# Altium PCB USB转换器.PcbDoc
Units mil, origin at the board's own origin, x right, y up, seen from the top; angles counter-clockwise.
Board outline 2450 x 1645 mil, 2 copper layers (Top Layer, Bottom Layer); 42 components, 32 nets, 189 pads, 33 vias.
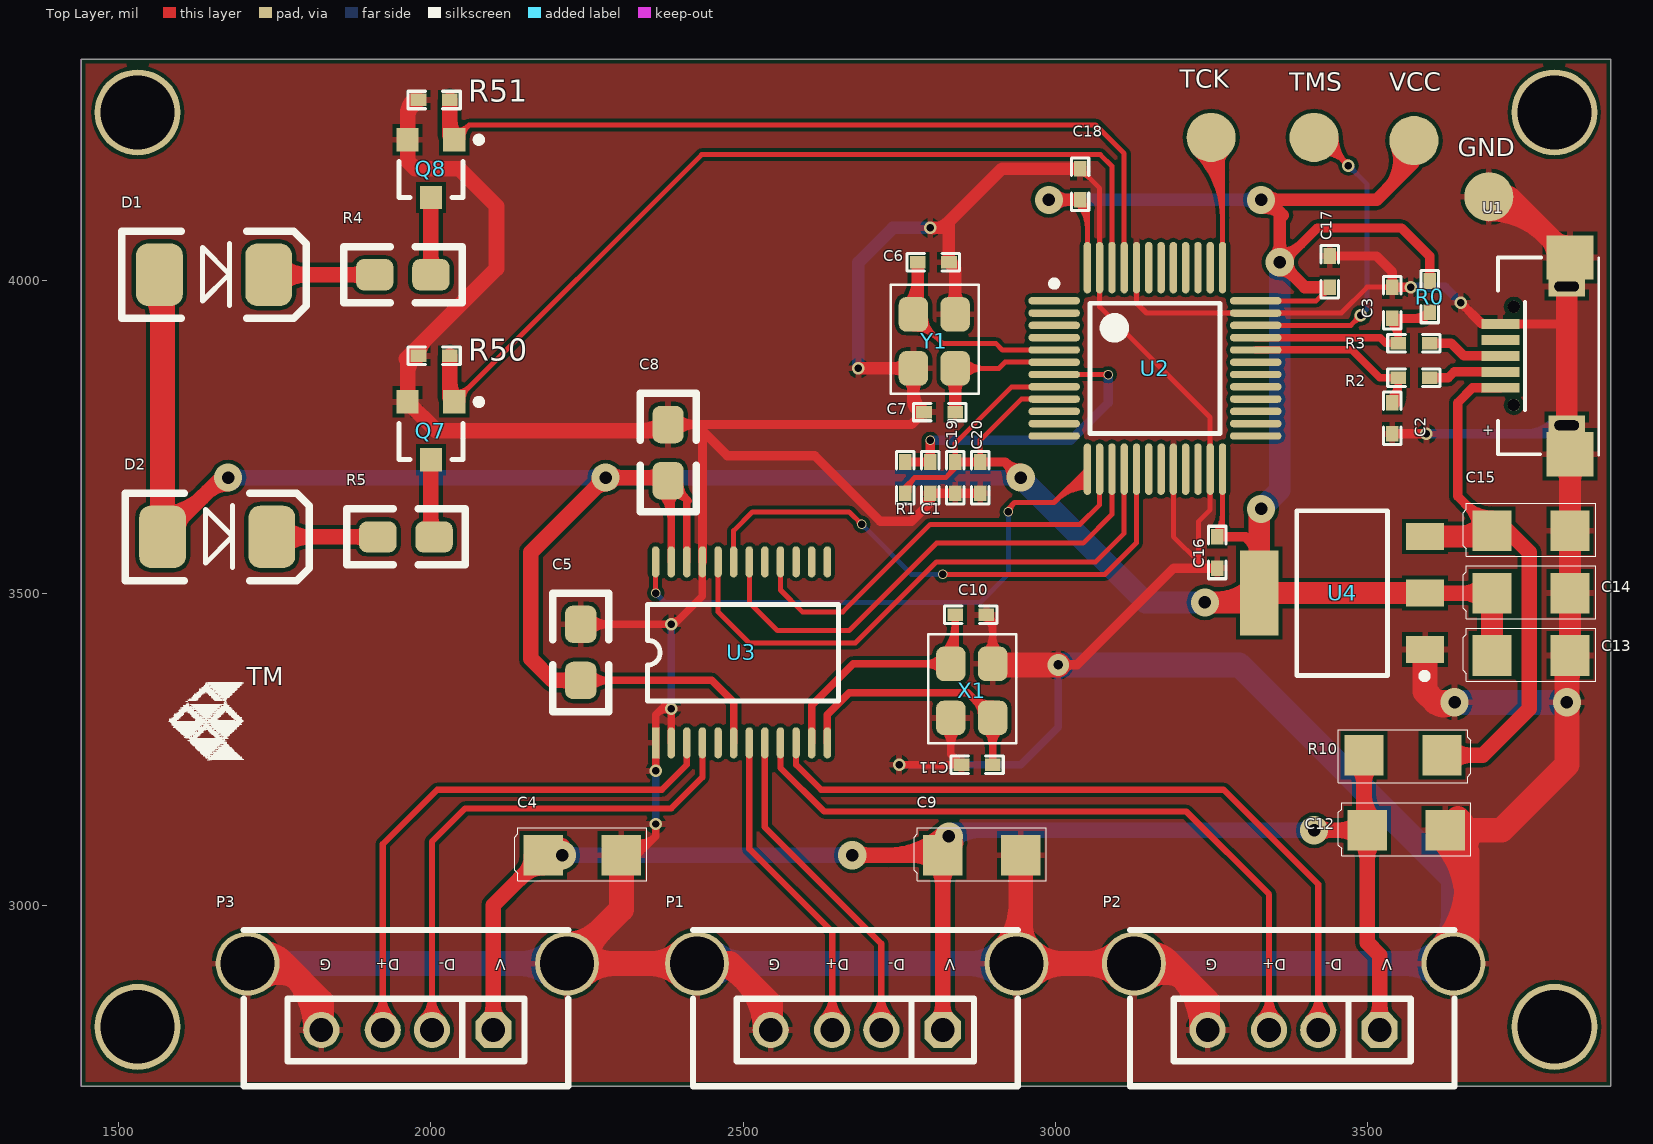
[diagram p0: Top Layer view]
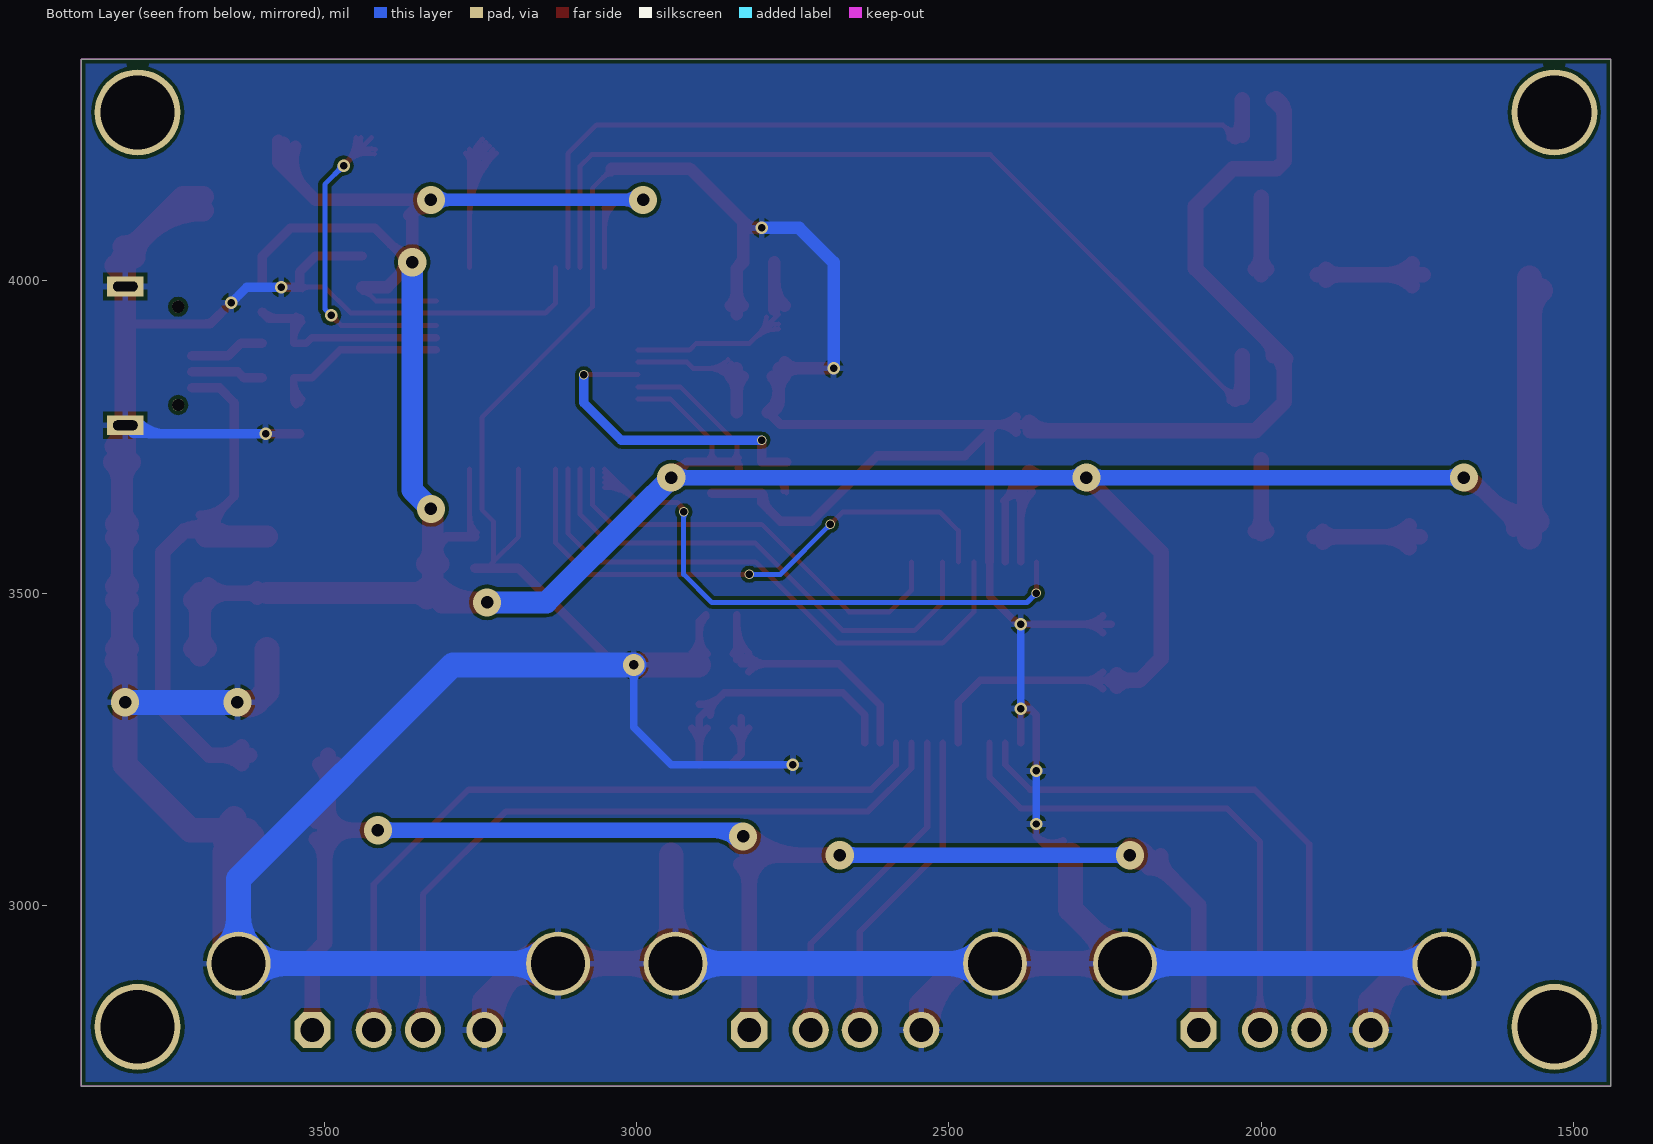
[diagram p1: Bottom Layer view, seen from below]

## Layer stack, top to bottom
Top Layer: signal copper 1.4
Dielectric: dielectric 12.6, FR-4, Dk 4.8
Bottom Layer: signal copper 1.4

## Board outline
1440,2710 1440,4355 3890,4355 3890,2710

## Design rules (kind name [scope] priority, off if disabled: settings)
Clearance [All] p1: gap=6
HoleSize [All] p1: absolutevalues=TRUE maxlimit=1000 minlimit=1 maxpercent=80.000 minpercent=20.000
HoleToHoleClearance [All] p1: gap=0 allowstackedmicrovias=TRUE
MinimumSolderMaskSliver [All] p1: minsoldermaskwidth=0
PolygonConnect [All] p1: connectstyle=Relief reliefconductorwidth=10 reliefentries=4 polygonreliefangle="90 Angle"
RoutingVias [All] p1: holewidth=28 width=50 viastyle="Through Hole" minholewidth=28 minwidth=50 maxholewidth=28 maxwidth=50
SilkToSilkClearance [All] p1: silktosilkclearance=0
SilkscreenOverComponentPads [All] p1: minsilkscreentomaskgap=0
SolderMaskExpansion [All] p1: expansion=4
TestPointUsage [All] p1: valid=0 allowmultiple=FALSE
Testpoint [All] p1: side=15 testpointundercomponent=TRUE minsize=40 maxsize=100 preferedsize=60 minholesize=0 maxholesize=40 preferedholesize=32 testpointgrid=1 style=1023 order=0123456789
Width [All] p1: maxlimit=40 minlimit=6 preferedwidth=8
19 further rules are at their usual default settings.

## Components (designator, comment, footprint, x,y, rotation, side; value= is the part's Value field where it differs from the comment)
C1 "20pF" 0402S 2800,3710 r270 top
C2 "10pF" 0402S 3540,3805 r270 top
C3 "10pF" 0402S 3540,3940 r90 top
C4 "47u" 3216C 2180,3080 r180 top
C5 "0.1uF" 0805 2240,3360 r90 top
C6 "20pF" 0402S 2780,4030 r0 top
C7 "20pF" 0402S 2840,3790 r180 top
C8 "0.01uF" 0805 2380,3680 r90 top
C9 "47u" 3216C 2820,3080 r180 top
C10 "20PF" 0402S 2840,3465 r0 top
C11 "20PF" 0402S 2900,3225 r180 top
C12 "47u" 3216C 3500,3120 r180 top
C13 "47uF" 3216C 3700,3400 r180 top
C14 "47uF" 3216C 3700,3500 r180 top
C15 "47uF" 3216C 3700,3600 r180 top
C16 "Cap" 0402S 3260,3540 r90 top
C17 "Cap" 0402S 3440,4040 r270 top
C18 "Cap" 0402S 3040,4180 r270 top
C19 "Cap" 0402S 2840,3660 r90 top
C20 "Cap" 0402S 2880,3660 r90 top
D1 "SS210" 7227D 1740,4010 r180 top
D2 "SS210" 7227D 1745,3590 r180 top
P1 "USB" USBA 2820,2800 r180 top
P2 "USB" USBA 3520,2800 r180 top
P3 "USB" USBA 2100,2800 r180 top
Q7 "SI2302" SOT23A 2000,3760 r180 top
Q8 "SI2302" SOT23A 2000,4180 r180 top
R0 "Res1" 0402S 3600,4000 r270 top
R1 "Res1" 0402S 2760,3710 r270 top
R2 "Res1" 0402S 3600,3845 r180 top
R3 "Res1" 0402S 3600,3900 r180 top
R4 "1K" 0805 2000,4010 r180 top
R5 "1K" 0805 2005,3590 r180 top
R10 "Res1" 3216C 3620,3240 r0 top
R50 "1M" 0402S 1980,3880 r0 top
R51 "1M" 0402S 1980,4290 r0 top
U1 "MicroUSB" Micro-USB 3800,3880 r90 top
U2 "STM32F103C" LQFP-48_M 3160,3860 r0 top
U3 "CH374U" SSOP24 2360,3260 r0 top
U4 "LM1117_3V3" SOT-223 3460,3500 r90 top
X1 "XTAL" 3225_无源 2900,3300 r90 top
Y1 "XTAL" 3225_无源 2840,3860 r90 top

## Footprints (in the part's own frame and the unit in brackets; to place one, negate y for a bottom-side part, rotate by r counter-clockwise, add the part's x,y. Pads: shape width x height; smd on the part's side, far side on the other; paste and mask are expansions set on the pad)
0402S [mil]
  rect 25x20 smd: 1(0,0) 2(50,0)
  silkscreen extent -17,-14 67,14
0805 [mil]
  rrect50% 60x50 smd: 1(0,0) 2(90,0)
  silkscreen extent -50,-45 140,45
3216C [mm]
  rect 1.6x1.65 smd: 1(0,0) 2(-3.175,0)
  silkscreen extent -4.22,-1.12 1.17,1.04
3225_无源 [mm]
  rrect50% 1.4x1.2 smd: 1(0,0) 2(2.2,1.7) GND(0,1.7) GND(2.2,0)
  silkscreen extent -1.04,-0.97 3.4,2.62
7227D [mil]
  rrect50% 75x100 smd: 1(175,0) 2(0,0)
  silkscreen extent -60,-70 235,70
LQFP-48_M [mm] "Thin QFP, 48-Leads, Body 7x7mm, Pitch 0.5mm, IPC Low Density"
  oval 2.1x0.3 smd: 1(-4.1,2.75) 2(-4.1,2.25) 3(-4.1,1.75) 4(-4.1,1.25) 5(-4.1,0.75) 6(-4.1,0.25) 7(-4.1,-0.25) 8(-4.1,-0.75) 9(-4.1,-1.25) 10(-4.1,-1.75) 11(-4.1,-2.25) 12(-4.1,-2.75) 25(4.1,-2.75) 26(4.1,-2.25) 27(4.1,-1.75) 28(4.1,-1.25) 29(4.1,-0.75) 30(4.1,-0.25) 31(4.1,0.25) 32(4.1,0.75) 33(4.1,1.25) 34(4.1,1.75) 35(4.1,2.25) 36(4.1,2.75)
  oval 0.3x2.1 smd: 13(-2.75,-4.1) 14(-2.25,-4.1) 15(-1.75,-4.1) 16(-1.25,-4.1) 17(-0.75,-4.1) 18(-0.25,-4.1) 19(0.25,-4.1) 20(0.75,-4.1) 21(1.25,-4.1) 22(1.75,-4.1) 23(2.25,-4.1) 24(2.75,-4.1) 37(2.75,4.1) 38(2.25,4.1) 39(1.75,4.1) 40(1.25,4.1) 41(0.75,4.1) 42(0.25,4.1) 43(-0.25,4.1) 44(-0.75,4.1) 45(-1.25,4.1) 46(-1.75,4.1) 47(-2.25,4.1) 48(-2.75,4.1)
  silkscreen extent -4.22,-2.65 2.65,3.57, body extent -3.5,-3.5 3.5,3.5, height 1.6
Micro-USB [mm]
  rect 0.4x1.55 smd: 1(-1.3,2.2) 2(-0.65,2.2) 3(0,2.2) 4(0.65,2.2) 5(1.3,2.2)
  rect 1.8x1.9 smd: S1(-4,-0.635) S2(4,-0.635)
  rect 0.8x1.5 hole 0.4 slot 1 at 90 deg: S3(-2.825,-0.5) S4(2.825,-0.5)
  round 0.5 hole 0.5 unplated: ""(-2,1.65) ""(2,1.65)
  silkscreen extent -4.05,-1.8 4,2.3
SOT23A [mm] "SOT-23; 3 Leads; Body 3.0 x 2.5 mm, inc. leads (LxW max)"
  rect 0.9x0.95 smd: 1(-0.95,-1.175) 2(0.95,-1.175) 3(0,1.175)
  silkscreen extent -2.07,-1.3 1.3,1.18
SOT-223 [mm]
  rect 1.1x1.55 smd: 1(-2.3,-3.375) 2(0,-3.375) 3(2.3,-3.375)
  rect 3.45x1.55 smd: 4(0,3.375)
  silkscreen extent -3.5,-3.48 3.35,1.85, body extent -3.3,-3.94 3.3,3.43, height 0.8
SSOP24 [mil]
  rect 12x50 smd: 1(0,0)
  oval 12x50 smd: 2(25,0) 3(50,0) 4(75,0) 5(100,0) 6(125,0) 7(150,0) 8(175,0) 9(200,0) 10(225,0) 11(250,0) 12(275,0) 13(275,290) 14(250,290) 15(225,290) 16(200,290) 17(175,290) 18(150,290) 19(125,290) 20(100,290) 21(75,290) 22(50,290) 23(25,290) 24(0,290)
  silkscreen extent -13,67 293,222
USBA [mm]
  oct 1.473x1.473 hole 0.965: 1(0,0)
  round 1.473 hole 0.965: 2(2.5,0) 3(4.5,0) 4(7,0)
  round 2.6 hole 2.2: 5(-3,-2.7) 6(10,-2.7)
  silkscreen extent -3.05,-4.06 10.16,2.29

## Part data
C1 C2 C3 C6 C7: library part Capacitor_ST, "Capacitor 0402 / 0603 / 0805"
C4 C9 C12: library part CAP470U
C5 C8 C10 C11: library part CAP, "Capacitor"
C13 C14 C15: library part ELECTRO1, "Electrolytic Capacitor"
C16 C17 C18 C19 C20: "Capacitor"
D1 D2: library part LED
P1 P2 P3: library part USB2
R0 R1 R2 R3 R10: "Resistor"
R4 R5 R50 R51: library part RES2
U2: "STM32单片机48引脚"
U4: library part LM1117_3.3V
X1: library part CRYSTAL, "Crystal"
Y1: "Crystal Oscillator"

## Free pads (board coordinates)
  round 137.8 hole 118.11: 0(1530,4270) 1(3800,4270) 2(3800,2805) 3(1530,2805)
  round 78.74 smd: 0(3250,4230) 1(3415,4230) 2(3575,4225) 3(3695,4135)

## Via types
v1: diameter 45, hole 20, Top Layer to Bottom Layer, tented both sides, 14 vias
v2: diameter 20, hole 12, Top Layer to Bottom Layer, tented both sides, 12 vias
v3: diameter 15, hole 12, Top Layer to Bottom Layer, tented both sides, 6 vias
v4: diameter 35, hole 15, Top Layer to Bottom Layer, tented both sides, 1 vias

## Nets (pads, with @x,y where several pads share a name; then routed paths per layer and width w, separated by ;. In a path a pad name is that pad's centre, name@x,y a point inside that pad or via, vN(x,y) a via of type N, cw(c..) or ccw(c..) an arc to the next point about the centre after c; other vN are vias at no path point)
+5: C4.1 C9.1 C12.1 P1.1 P2.1 P3.1 R10.2 | length 3619.2
  Top Layer w25: P3.1@2088.33,2811.67 ccw(c2060.17,2839.83) 2100,2839.83 ccw(c2139.83,2839.83) P3.1@2111.67,2811.67 ; P3.1 2100,3000 C4.1 ; 2141.72,3041.72 cw(c2210,2973.43) C4.1@2210,3070 ; 2145.89,3045.89 cw(c2180,3011.78) C4.1@2180,3060.02 ; 2148.27,3048.27 ccw(c2117.52,3079.02) C4.1@2161,3079.02 ; C4.1@2165,3065 cw(c2189.35,3040.65) C4.1@2205.35,3071.14 ; C4.1@2184.39,3084.39 cw(c2210,3058.79) C4.1@2210,3095 ; v1(2675,3080) C9.1 P1.1 ; v1@2682.07,3072.93 cw(c2699.14,3055.86) 2699.14,3080 cw(c2699.14,3104.14) v1@2682.07,3087.07 ; 2733.43,3080 ccw(c2733.43,3206.57) v1@2822.93,3117.07 ; C9.1@2793.79,3080 ccw(c2793.79,3146.21) C9.1@2840.61,3099.39 ; C9.1@2806.57,3065.58 cw(c2774.14,3033.16) 2820,3033.16 cw(c2865.86,3033.16) C9.1@2833.43,3065.58 ; C9.1@2806.57,3066.57 ccw(c2774.14,3034.14) 2774.14,3080 ccw(c2774.14,3125.86) C9.1@2806.57,3093.43 ; P1.1@2808.33,2811.67 ccw(c2780.17,2839.83) 2820,2839.83 ccw(c2859.83,2839.83) P1.1@2831.67,2811.67 ; C9.1@2820,3061.72 cw(c2878.28,3061.72) C9.1@2837.07,3102.93 ; C9.1@2820,3078.38 cw(c2845,3078.38) C9.1@2834.29,3100.96 ; v1(3415,3120) C12.1 3500,2940 3520,2920 P2.1 ; v1@3422.07,3112.93 cw(c3439.14,3095.86) 3439.14,3120 cw(c3439.14,3144.14) v1@3422.07,3127.07 ; R10.2@3481.57,3225.58 cw(c3449.14,3193.16) 3495,3193.16 cw(c3540.86,3193.16) R10.2@3508.43,3225.58 ; C12.1@3486.57,3105.58 cw(c3454.14,3073.16) 3500,3073.16 cw(c3545.86,3073.16) C12.1@3513.43,3105.58 ; C12.1@3486.57,3106.57 ccw(c3454.14,3074.14) 3454.14,3120 ccw(c3454.14,3165.86) C12.1@3486.57,3133.43 ; C12.1@3486.57,3134.42 ccw(c3466.21,3154.77) 3495,3154.77 ; C12.1@3495,3125 R10.2 ; 3495,3178.92 ccw(c3557.93,3178.92) C12.1@3513.43,3134.42 ; P2.1@3508.33,2811.67 ccw(c3480.17,2839.83) 3520,2839.83 ccw(c3559.83,2839.83) P2.1@3531.67,2811.67
  Bottom Layer w25: v1(2210,3080) v1(2675,3080) ; v1@2217.07,3072.93 cw(c2234.14,3055.86) 2234.14,3080 cw(c2234.14,3104.14) v1@2217.07,3087.07 ; v1@2667.93,3072.93 ccw(c2650.86,3055.86) 2650.86,3080 ccw(c2650.86,3104.14) v1@2667.93,3087.07 ; v1@2830,3115 2835,3120 v1(3415,3120) ; v1@2837.07,3102.93 cw(c2878.28,3061.72) 2878.28,3120 ; v1@3407.93,3112.93 ccw(c3390.86,3095.86) 3390.86,3120 ccw(c3390.86,3144.14) v1@3407.93,3127.07
  other v1: 2830,3110
GND: C1.2 C2.2 C3.2 C4.2 C5.2 C6.2 C7.2 C8.2 C9.2 C10.2 C11.2 C12.2 C13.2 C14.2 C15.2 C16.1 C17.1 C18.1 C19.1 C20.1 P1.4 P1.5 P1.6 P2.4 P2.5 P2.6 P3.4 P3.5 P3.6 pad.3@3695,4135 Q7.2 Q8.2 R50.1 R51.1 U1.5 U1.S1 U1.S2 U1.S3 U1.S4 U2.20 U2.23 U2.35 U2.44 U2.47 U3.1 U3.2 U3.21 U4.1 X1.GND Y1.GND | length 17524.2
  Top Layer w8: C18.1@3040,4171.5 cw(c3040,4150.98) 3054.51,4165.49 ; C18.1 3071.42,4148.58 U2.47 3071.42,3958.58 3248.58,3781.42 U2.23 3248.58,3633.58 3230,3615 3230,3550 ; C18.1@3046,4177.5 ccw(c3054.45,4177.5) C18.1@3048.47,4171.53 ; U2.44 3130.47,3964.53 3146.42,3948.58 U2.35 3458.58,3948.58 3500,3990 C3.2 ; U2.20 3189.53,3590.47 3230,3550 ; 3240,3540 3230,3550 ; C3.2@3535.76,3985.76 ccw(c3525.51,3975.51) 3525.51,3990 ccw(c3525.51,4004.49) C3.2@3535.76,3994.24
  Top Layer w12: C5.2 v2(2385,3450) 2390,3450 2435,3495 U3.21 ; C5.2@2253.44,3436.56 cw(c2285.87,3404.13) 2285.87,3450 cw(c2285.87,3495.87) C5.2@2253.44,3463.44 ; C4.2 2330,3080 2360,3110 ; C4.2@2305.7,3082.31 ccw(c2318.17,3105.87) 2337.02,3087.02 ; C4.2@2311.31,3092.91 ccw(c2326.12,3120.89) 2348.51,3098.51 ; C4.2@2316.93,3103.52 ccw(c2334.08,3135.92) 2360,3110 ; v2(2360,3130) 2360,3110 ; v2@2360,3220 U3.1 2360,3305 2370,3315 v2(2385,3315) U3.2 ; 2362.5,3307.5 cw(c2375.73,3294.27) v2@2383.37,3311.35 ; 2373.05,3318.05 cw(c2385,3306.1) v2@2385,3323 ; v2@2385,3454 ccw(c2385,3475.73) 2400.36,3460.36 ; v2(2750,3225) C11.2 2833.07,3241.93 X1.GND@2833.07,3300 ; X1.GND@2820.61,3283.6 cw(c2790.53,3253.52) 2833.07,3253.52 cw(c2875.61,3253.52) X1.GND@2845.53,3283.6 ; 2838.9,3236.1 cw(c2827.81,3225) C11.2@2843.5,3225 ; X1.GND@2887.54,3403.01 ccw(c2857.46,3433.09) 2900,3433.09 ccw(c2942.54,3433.09) X1.GND@2912.46,3403.01 ; C10.2@2889.67,3462.17 cw(c2864.74,3437.24) 2900,3437.24 ; C10.2 2900,3455 X1.GND@2900,3386.61
  Top Layer w15: C8.2 2425,3770 ; C8.2@2392.37,3757.63 cw(c2422.25,3727.75) 2422.25,3770 cw(c2422.25,3812.25) C8.2@2392.37,3782.37 ; U3.21 2435,3760 ; C7.2@2781.46,3781.46 ccw(c2772.93,3790) C7.2@2785,3790 ; 2786.89,3631.89 ccw(c2761.29,3657.5) C1.2@2797.5,3657.5 ; C7.2 2770,3770 2425,3770 ; C20.1 C19.1 C1.2 2800,3645 2770,3615 2720,3615 2615,3720 2475,3720 2435,3760 ; v4(3005,3385) 3035,3385 3190,3540 3240,3540 C16.1 ; v4@3012.07,3377.93 cw(c3029.14,3360.86) 3029.14,3385 cw(c3029.14,3409.14) v4@3012.07,3392.07 ; C17.1 3515,4040 3540,4015 C3.2 v2(3570,3990) ; C2.2 v2(3595,3755) ; v2(3650,3965) 3683.82,3931.18 U1.5 3818.51,3931.18 ; 3678.28,3936.72 ccw(c3690.75,3949.18) U1.5@3690.75,3931.55 ; 2425,3770 2435,3760
  Top Layer w20: v2(2685,3860) 2773.07,3860 2773.07,3806.93 ; Y1.GND@2763.44,3846.43 cw(c2740.18,3823.18) 2773.07,3823.18 cw(c2805.96,3823.18) Y1.GND@2782.7,3846.43 ; Y1.GND@2763.44,3850.37 ccw(c2740.18,3827.11) 2740.18,3860 ccw(c2740.18,3892.89) Y1.GND@2763.44,3869.63 ; 2773.07,3824.83 ccw(c2822.33,3824.83) 2787.5,3790 cw(c2790.22,3806.93) 2773.07,3806.93 ; C7.2 2773.07,3806.93 ; Y1.GND@2830.37,3960.18 ccw(c2807.11,3983.44) 2840,3983.44 ccw(c2872.89,3983.44) Y1.GND@2849.63,3960.18 ; C6.2@2832.5,4030 cw(c2814.39,4011.89) 2840,4011.89 ; Y1.GND@2840,3946.61 2840,4020 C6.2 2830,4095 ; C18.1 2915,4180 2830,4095 ; 2830,4095 cw(c2805,4120) v2(2800,4085) 2820,4085 2830,4095
  Top Layer w25: 1960.43,3875.43 cw(c1977.5,3858.36) R50.1@1977.5,3882.5 ; 1962.6,3850.06 cw(c2007.44,3850.06) R50.1@1975.73,3881.77 ; 1962.6,3864.91 cw(c1980.48,3864.91) R50.1@1977.02,3882.45 ; 1962.6,4260.06 cw(c2007.44,4260.06) R51.1@1975.73,4291.77 ; 1962.6,4267.09 cw(c1992.46,4267.09) R51.1@1976.13,4292.09 ; R50.1 cw(c2016.21,3880) 1990.61,3905.61 ; R51.1 1962.6,4272.6 Q8.2 1962.6,4192.4 1975,4180 2045,4180 2105,4120 2105,4020 1962.6,3877.6 Q7.2 2008.86,3760 C8.2@2370,3760 ; 2337.75,3760 ccw(c2337.75,3807.25) C8.2@2371.16,3773.84
  Top Layer w35: pad.3@3695,4113.13 cw(c3695,3981.92) 3787.78,4074.7 ; pad.3@3695,4135 3727.48,4135 U1.S2 3819.68,4032.17 U1.S4 U1.S3 ; U1.S2@3791.03,4071.45 cw(c3757.05,4037.48) U1.S2@3805.1,4037.48 ; U1.S2@3795.78,4066.7 ccw(c3823.03,4093.95) U1.S2@3823.03,4055.41 ; U1.S1@3812.32,3709.84 cw(c3781.71,3679.23) 3825,3679.23 cw(c3868.29,3679.23) U1.S1@3837.68,3709.84 ; C13.2@3815.1,3410.88 ccw(c3791.21,3434.77) 3825,3434.77 ccw(c3858.79,3434.77) C13.2@3834.9,3410.88 ; C14.2@3815.1,3489.12 cw(c3791.21,3465.23) 3825,3465.23 cw(c3858.79,3465.23) C14.2@3834.9,3489.12 ; C14.2@3815.1,3510.88 ccw(c3791.21,3534.77) 3825,3534.77 ccw(c3858.79,3534.77) C14.2@3834.9,3510.88 ; C15.2@3815.1,3589.12 cw(c3791.21,3565.23) 3825,3565.23 cw(c3858.79,3565.23) C15.2@3834.9,3589.12 ; C15.2@3815.1,3610.88 ccw(c3791.21,3634.77) 3825,3634.77 ccw(c3858.79,3634.77) C15.2@3834.9,3610.88 ; U1.S1@3819.68,3727.83 U1.S3 ; U1.S3@3819.68,3773.89 ccw(c3874.4,3773.89) U1.S1@3835.71,3735.2 ; U1.S4@3819.68,3986.11 cw(c3874.4,3986.11) U1.S2@3835.71,4024.8 ; C13.2 C14.2 C15.2 U1.S1 ; U1.S3 ccw(c3862.67,3768.78) 3834.7,3736.14 cw(c3862.67,3768.78) U1.S3 ; U1.S4@3819.68,3991.1 cw(c3862.93,3991.1) 3834.73,4023.89 ccw(c3862.93,3991.1) U1.S4@3819.68,3991.1
  Top Layer w40: P3.6@1700.87,2913.25 cw(c1728.57,2877.75) 1760.41,2909.59 ; P3.6@1706.07,2915.11 cw(c1708.98,2804.42) 1787.28,2882.72 ; P3.6 1763.7,2906.3 ; P3.6@1725.48,2881.72 cw(c1756.61,2841.81) 1792.4,2877.6 ; P3.6@1732.46,2889.33 cw(c1763.7,2869.06) 1763.7,2906.3 ; P3.6@1732.46,2923.27 ccw(c1763.7,2943.54) 1763.7,2906.3 ; 1776.81,2893.19 cw(c1683.62,2800) P3.4@1815.41,2800 ; P3.4 1824.41,2845.59 1763.7,2906.3 ; P3.5@2218.11,2937.48 ccw(c2218.11,3012.76) 2271.34,2959.53 ccw(c2324.57,2906.3) P3.5@2249.29,2906.3 ; P3.5@2240.16,2884.25 cw(c2293.39,2831.02) 2293.39,2906.3 cw(c2293.39,2981.58) P3.5@2240.16,2928.35 ; C4.2 2305,2993.19 P3.5 P1.6 2478.7,2906.3 2544.41,2840.59 P1.4 ; P1.6@2404.25,2884.25 ccw(c2351.02,2831.02) 2351.02,2906.3 ccw(c2351.02,2981.58) P1.6@2404.25,2928.35 ; P1.6@2426.3,2915.12 cw(c2426.3,2809.9) 2500.7,2884.3 ; 2500.34,2884.66 cw(c2415.69,2800) P1.4@2535.41,2800 ; X1.GND@2901.61,3385 v4(3005,3385) ; P1.5@2916.06,2928.35 ccw(c2846.2,2998.21) 2945,2998.21 ; P1.5 P2.6 3183.7,2906.3 ; P1.5@2945,2913.19 C9.2 ; 2945,2964.94 ccw(c2996.75,2964.94) 2960.16,2928.35 ccw(c3013.39,2981.58) 3013.39,2906.3 ccw(c3013.39,2831.02) P1.5@2960.16,2884.25 ; P2.6@3104.25,2884.25 ccw(c3051.02,2831.02) 3051.02,2906.3 ccw(c3051.02,2981.58) P2.6@3104.25,2928.35 ; P2.6@3120.87,2913.25 cw(c3148.57,2877.75) 3180.41,2909.59 ; P2.6@3126.07,2915.11 cw(c3128.98,2804.42) 3207.28,2882.72 ; P2.6@3145.48,2881.72 cw(c3176.61,2841.81) 3212.4,2877.6 ; P2.6@3152.46,2889.33 cw(c3183.7,2869.06) 3183.7,2906.3 ; P2.6@3152.46,2923.27 ccw(c3183.7,2943.54) 3183.7,2906.3 ; 3196.81,2893.19 cw(c3103.62,2800) P2.4@3235.41,2800 ; P2.4 3244.41,2845.59 3183.7,2906.3 ; U4.1 3592.87,3342.13 3610,3325 v1(3640,3325) ; 3607.87,3327.13 ccw(c3623.24,3342.49) v1@3638.27,3326.8 ; P2.5@3616.06,2928.35 ccw(c3509.99,3034.42) 3660,3034.42 ; C12.2@3616.87,3110.89 cw(c3512.75,3006.76) 3660,3006.76 ; C12.2@3624.44,3107.53 cw(c3622.63,3070.21) 3660,3070.21 ; P2.5 3660,2928.19 3660,3085 C12.2 ; C12.2@3638.11,3106.89 C12.2 ; C12.2@3645.16,3139.17 cw(c3609.32,3103.33) 3660,3103.33 ; 3820,3359.19 cw(c3864.82,3359.19) C13.2@3833.13,3390.89 ; C13.2@3820,3395 v1(3820,3325) 3820,3225 3715,3120 C12.2
  Bottom Layer w12: v2(2360,3130) v2(2360,3215) ; v2(2385,3315) v2(2385,3450) ; v2(2750,3225) 2945,3225 3005,3285 v4(3005,3385) ; v4@2996.87,3376.87 cw(c2977.24,3357.24) 3005,3357.24 cw(c3032.76,3357.24) v4@3013.13,3376.87
  Bottom Layer w15: v2(3570,3990) 3625,3990 v2(3650,3965) ; v2(3595,3755) 3805.91,3755 U1.S3 ; 3752.73,3755 ccw(c3752.73,3821.96) U1.S3@3800.07,3774.61 ; 3788.94,3755 ccw(c3788.94,3785.75) U1.S3@3810.68,3764.01
  Bottom Layer w20: v2(2685,3860) 2685,4030 2740,4085 v2(2800,4085)
  Bottom Layer w40: P3.6 P3.5 ; P3.6@1728.35,2884.25 cw(c1781.58,2831.02) 1781.58,2906.3 cw(c1781.58,2981.58) P3.6@1728.35,2928.35 ; P3.5@2196.06,2884.25 ccw(c2142.83,2831.02) 2142.83,2906.3 ccw(c2142.83,2981.58) P3.5@2196.06,2928.35 ; P1.6 P1.5 ; P1.6@2448.35,2884.25 cw(c2501.58,2831.02) 2501.58,2906.3 cw(c2501.58,2981.58) P1.6@2448.35,2928.35 ; P1.5@2916.06,2884.25 ccw(c2862.83,2831.02) 2862.83,2906.3 ccw(c2862.83,2981.58) P1.5@2916.06,2928.35 ; v4(3005,3385) 3295,3385 3638.11,3041.89 P2.5 P2.6 ; P2.6@3148.35,2884.25 cw(c3201.58,2831.02) 3201.58,2906.3 cw(c3201.58,2981.58) P2.6@3148.35,2928.35 ; P2.5@3616.06,2884.25 ccw(c3562.83,2831.02) 3562.83,2906.3 ccw(c3562.83,2981.58) 3616.06,2928.35 ccw(c3562.83,2981.58) 3638.11,2981.58 ccw(c3713.39,2981.58) P2.5@3660.16,2928.35 ; v1(3640,3325) v1(3820,3325)
INT#: U2.13 U3.24 | length 1085.4
  Top Layer w8: v3@2357.53,3502.47 ccw(c2351.55,3508.45) 2360,3508.45 ccw(c2368.45,3508.45) v3@2362.47,3502.47 ; v3(2360,3500) U3.24 ; v3(2925,3630) 2925,3635 2935,3645 2998.15,3645 U2.13 ; v3@2928.5,3630 cw(c2949.02,3630) 2934.51,3644.51 ; 3001.65,3648.5 cw(c3051.73,3598.41) U2.13@3051.73,3669.24 ; 3015.31,3662.16 cw(c3051.73,3625.73) U2.13@3051.73,3677.24 ; 3028.96,3675.81 cw(c3051.73,3653.04) U2.13@3051.73,3685.24 ; 3042.62,3689.47 cw(c3051.73,3680.36) U2.13@3051.73,3693.24
  Bottom Layer w8: v3@2360,3496.5 cw(c2360,3488.05) 2365.97,3494.03 cw(c2371.95,3500) v3@2363.5,3500 ; v3(2360,3500) 2375,3485 2880,3485 2925,3530 v3(2925,3630) ; v3@2922.53,3627.53 cw(c2916.55,3621.55) 2925,3621.55 cw(c2933.45,3621.55) v3@2927.47,3627.53
LED0: Q8.1 R51.2 U2.45 | length 1420.8
  Top Layer w8: Q8.1 2061.14,4250 ; Q8.1@2037.96,4240.95 ccw(c2039.23,4271.91) 2061.14,4250 ; Q8.1@2051.12,4227.24 cw(c2081.86,4227.24) 2060.12,4248.98 ; U2.45 3110.79,4204.21 3065,4250 2061.14,4250
  Top Layer w25: Q8.1@2030,4233.66 R51.2 ; 2030,4257.71 ccw(c2067.86,4257.71) Q8.1@2041.09,4230.93
LED1: Q7.1 R50.2 U2.46 | length 1536.1
  Top Layer w8: Q7.1 2433.64,4202.5 3072.5,4202.5 3091.1,4183.9 U2.46 ; Q7.1@2037.4,3820.96 ccw(c2037.4,3856.45) 2062.5,3831.36 ; Q7.1@2051.12,3807.24 cw(c2081.86,3807.24) 2060.12,3828.98
  Top Layer w25: Q7.1@2030,3813.66 R50.2 ; 2030,3837.71 ccw(c2067.86,3837.71) Q7.1@2041.09,3810.93
NetC1_1: C1.1 R1.1 U2.7 | length 529.4
  Top Layer w8: U2.7 v3@3084.84,3850.16 ; 3076.17,3850.16 cw(c3076.17,3841.17) v3@3082.53,3847.53 ; 3076.93,3850.16 ccw(c3076.93,3858.07) v3@3082.53,3852.47
  Top Layer w15: R1.1 C1.1 v3(2800,3745)
  Bottom Layer w15: v3(2800,3745) 3025,3745 3085,3805 v3(3085,3850)
NetD1_2: D1.2 R4.2 | length 312.2
  Top Layer w25: D1.2 R4.2 ; D1.2@1757.68,3992.32 cw(c1800.36,3949.64) 1800.36,4010 cw(c1800.36,4070.36) D1.2@1757.68,4027.68 ; R4.2@1896.16,4001.16 ccw(c1874.82,3979.82) 1874.82,4010 ccw(c1874.82,4040.18) R4.2@1896.16,4018.84
NetD2_2: D2.2 R5.2 | length 312.2
  Top Layer w25: D2.2 R5.2 ; D2.2@1762.68,3572.32 cw(c1805.36,3529.64) 1805.36,3590 cw(c1805.36,3650.36) D2.2@1762.68,3607.68 ; R5.2@1901.16,3581.16 ccw(c1879.82,3559.82) 1879.82,3590 ccw(c1879.82,3620.18) R5.2@1901.16,3598.84
NetQ7_3: Q7.3 R5.1 | length 166.1
  Top Layer w25: R5.1@1991.16,3598.84 ccw(c1969.82,3620.18) 2000,3620.18 ccw(c2030.18,3620.18) R5.1@2008.84,3598.84 ; R5.1@2000,3595 Q7.3
NetQ8_3: Q8.3 R4.1 | length 171.1
  Top Layer w25: R4.1@1991.16,4018.84 ccw(c1969.82,4040.18) 2000,4040.18 ccw(c2030.18,4040.18) R4.1@2008.84,4018.84 ; R4.1 Q8.3
NetR2_1: R2.1 U1.2 | length 117.3
  Top Layer w15: R2.1 3630,3845 3639.41,3854.41 U1.2
NetR3_1: R3.1 U1.3 | length 121.7
  Top Layer w15: R3.1 3635,3900 3655,3880 U1.3
SCK: U2.15 U3.18 | length 814.3
  Top Layer w8: U3.18 2510,3485 2555,3440 2670,3440 2810,3580 3045,3580 3091.1,3626.1 U2.15
SCS: U2.14 U3.16 | length 699.1
  Top Layer w8: U3.16 2560,3505 2595,3470 2660,3470 2800,3610 3040,3610 3071.42,3641.42 U2.14
SDI: U2.17 U3.19 | length 941.4
  Top Layer w8: U3.19 2485,3600 2515,3630 2670,3630 v3(2690,3610) ; v3@2686.5,3610 ccw(c2678.05,3610) 2684.03,3615.97 ccw(c2690,3621.95) v3@2690,3613.5 ; v3(2820,3530) 3080,3530 3130.47,3580.47 U2.17 ; v3@2822.47,3527.53 cw(c2828.45,3521.55) 2828.45,3530 cw(c2828.45,3538.45) v3@2822.47,3532.47
  Bottom Layer w8: v3@2690,3606.5 cw(c2690,3598.05) 2695.97,3604.03 cw(c2701.95,3610) v3@2693.5,3610 ; v3(2690,3610) 2770,3530 v3(2820,3530) ; v3@2817.53,3527.53 ccw(c2811.55,3521.55) 2811.55,3530 ccw(c2811.55,3538.45) v3@2817.53,3532.47
SDO: U2.16 U3.20 | length 927.1
  Top Layer w8: U3.20 2460,3470 2510,3420 2680,3420 2810,3550 3065,3550 3110.79,3595.79 U2.16
SWCLK: pad.0@3250,4230 U2.37 | length 637
  Top Layer w8: pad.0@3224.99,4204.99 cw(c3120.51,4100.51) 3268.27,4100.51 ; pad.0@3230.65,4210.65 cw(c3139.82,4119.82) 3268.27,4119.82 ; pad.0@3236.3,4216.3 cw(c3159.13,4139.13) 3268.27,4139.13 ; pad.0@3241.96,4221.96 cw(c3178.45,4158.45) 3268.27,4158.45 ; pad.0@3247.62,4227.62 cw(c3197.76,4177.76) 3268.27,4177.76 ; U2.37 pad.0@3268.27,4211.73 ; 3268.27,4188.71 cw(c3291.29,4188.71) pad.0@3275.01,4204.99
SWDIO: pad.1@3415,4230 U2.34 | length 730.6
  Top Layer w8: U2.34 3473.9,3928.9 v2(3490,3945) ; pad.1@3419.11,4211.07 cw(c3427.22,4173.69) 3454.26,4200.74 ; pad.1@3420.8,4203.25 cw(c3430.91,4156.65) v2@3464.63,4190.37 ; pad.1@3425,4230 v2(3470,4185) ; pad.1@3442.37,4230 ccw(c3484.31,4230) 3454.65,4200.35 ; pad.1@3450.37,4230 ccw(c3511.62,4230) v2@3468.31,4186.69 ; v2@3464,4185 ccw(c3449.51,4185) 3459.76,4195.24 ccw(c3470,4205.49) v2@3470,4191 ; v2@3484,3945 cw(c3469.51,3945) 3479.76,3934.76 cw(c3490,3924.51) v2@3490,3939
  Bottom Layer w8: v2@3470,4179 cw(c3470,4164.51) 3480.24,4174.76 cw(c3490.49,4185) v2@3476,4185 ; v2(3470,4185) 3500,4155 3500,3955 v2(3490,3945)
UD1+: P2.3 U3.9 | length 1268.1
  Top Layer w10: U3.9 2560,3220 2630,3150 3210,3150 3342.83,3017.17 P2.3 ; P2.3@3325.86,2816.97 ccw(c3284.89,2857.94) 3342.83,2857.94 ccw(c3400.78,2857.94) P2.3@3359.81,2816.97 ; P2.3@3332.94,2809.9 ccw(c3309.04,2833.8) 3342.83,2833.8 ccw(c3376.63,2833.8) P2.3@3352.73,2809.9
UD1-: P2.2 U3.10 | length 1328.5
  Top Layer w10: U3.10 2585,3225 2625,3185 3270,3185 3421.57,3033.43 P2.2 ; P2.2@3404.6,2816.97 ccw(c3363.63,2857.94) 3421.57,2857.94 ccw(c3479.52,2857.94) P2.2@3438.55,2816.97 ; P2.2@3411.68,2809.9 ccw(c3387.78,2833.8) 3421.57,2833.8 ccw(c3455.37,2833.8) P2.2@3431.47,2809.9
UD2+: P3.3 U3.3 | length 1016.8
  Top Layer w10: P3.3@1905.86,2816.97 ccw(c1864.89,2857.94) 1922.83,2857.94 ccw(c1980.78,2857.94) P3.3@1939.81,2816.97 ; P3.3@1912.94,2809.9 ccw(c1889.04,2833.8) 1922.83,2833.8 ccw(c1956.63,2833.8) P3.3@1932.73,2809.9 ; P3.3 1922.83,3097.83 2010,3185 2370,3185 2410,3225 U3.3
UD2-: P3.2 U3.4 | length 976.9
  Top Layer w10: P3.2@1984.6,2816.97 ccw(c1943.63,2857.94) 2001.57,2857.94 ccw(c2059.52,2857.94) P3.2@2018.55,2816.97 ; P3.2@1991.68,2809.9 ccw(c1967.78,2833.8) 2001.57,2833.8 ccw(c2035.37,2833.8) P3.2@2011.47,2809.9 ; P3.2 2001.57,3101.57 2055,3155 2385,3155 2435,3205 U3.4
UD+: P1.3 U3.7 | length 659.1
  Top Layer w10: U3.7 2510,3090 2642.83,2957.17 P1.3 ; P1.3@2625.86,2816.97 ccw(c2584.89,2857.94) 2642.83,2857.94 ccw(c2700.78,2857.94) P1.3@2659.81,2816.97 ; P1.3@2632.94,2809.9 ccw(c2609.04,2833.8) 2642.83,2833.8 ccw(c2676.63,2833.8) P1.3@2652.73,2809.9
UD-: P1.2 U3.8 | length 681.4
  Top Layer w10: U3.8 2535,3125 2721.57,2938.43 P1.2 ; P1.2@2704.6,2816.97 ccw(c2663.63,2857.94) 2721.57,2857.94 ccw(c2779.52,2857.94) P1.2@2738.55,2816.97 ; P1.2@2711.68,2809.9 ccw(c2687.78,2833.8) 2721.57,2833.8 ccw(c2755.37,2833.8) P1.2@2731.47,2809.9
USB_5V: C15.1 R10.1 U1.1 U4.3 | length 1148.1
  Top Layer w15: 3657.36,3642.64 ccw(c3700,3685.29) C15.1@3700,3624.98 ; 3659.73,3640.27 cw(c3620.45,3600.98) C15.1@3676,3600.98 ; C15.1 3645,3655 3645,3805 3668.82,3828.82 U1.1
  Top Layer w25: R10.1 3685,3240 3760,3315 3760,3565 3725,3600 C15.1 ; R10.1@3633.43,3226.57 cw(c3665.86,3194.14) 3665.86,3240 cw(c3665.86,3285.86) R10.1@3633.43,3253.43 ; C15.1@3699.73,3605.01 cw(c3701.69,3560.98) 3732.85,3592.15
  Top Layer w35: U4.3 C15.1@3690.55,3590.55 ; 3645.77,3590.55 ccw(c3645.77,3653.24) C15.1@3690.1,3608.91
USB_DM: C2.1 R2.2 U2.32 | length 337.2
  Top Layer w12: U2.32 3475.47,3889.53 3520,3845 R2.2 3550,3815 C2.1 ; C2.1@3537.17,3810.33 ccw(c3506.2,3841.3) R2.2@3550,3841.3 ; C2.1@3545.66,3801.84 ccw(c3535.17,3812.33) 3550,3812.33
USB_DP: C3.1 R0.2 R3.2 U2.33 | length 411.6
  Top Layer w12: U2.33 3520.79,3909.21 3530,3900 R3.2 3550,3930 C3.1 ; C3.1@3537.17,3934.67 cw(c3506.2,3903.7) R3.2@3550,3903.7 ; C3.1@3545.66,3943.16 cw(c3535.17,3932.67) 3550,3932.67
  Top Layer w15: C3.1 3590,3940 R0.2 ; 3575.86,3940 ccw(c3575.86,3971.64) R0.2@3598.23,3949.27
VCC: C5.1 C8.1 C13.1 C14.1 C16.2 C17.2 C18.2 C19.2 C20.2 D1.1 D2.1 pad.2@3575,4225 R0.1 R1.2 U2.8 U2.9 U2.24 U2.36 U2.48 U3.6 U3.22 U3.23 U4.2 U4.4 | length 8859.2
  Top Layer w8: R1.2 2760,3670 2775,3685 ; R1.2@2766,3662.62 cw(c2796.74,3663.25) 2775,3685 ; 2828.75,3688.75 ccw(c2814.92,3702.58) C19.2@2834.11,3706.34 ; C19.2@2835.76,3716.74 ccw(c2825.51,3726.99) 2840,3726.99 ccw(c2854.49,3726.99) C19.2@2844.24,3716.74 ; C19.2@2840,3700 2825,3685 2775,3685 ; C19.2 2840,3740 2930.47,3830.47 U2.8 ; C20.2@2875.76,3716.74 ccw(c2865.51,3726.99) 2880,3726.99 ccw(c2894.49,3726.99) C20.2@2884.24,3716.74 ; C20.2 2880,3745 2945.79,3810.79 U2.9 ; C18.2@3035.76,4123.26 cw(c2997.19,4084.69) 3051.73,4084.69 ; C18.2 3051.73,4118.27 U2.48 ; C18.2@3040.54,4121.52 cw(c3041.95,4105.99) 3052.98,4117.02 ; C18.2@3041.41,4128.91 cw(c3016.5,4104) 3051.73,4104 ; C18.2@3046,4127.5 ccw(c3054.45,4127.5) C18.2@3048.47,4121.53 ; C16.2@3255.76,3596.74 ccw(c3225.55,3626.95) 3268.27,3626.95 ; C16.2 3268.27,3598.27 U2.24 ; C16.2@3261.41,3591.09 ccw(c3244.87,3607.63) 3268.27,3607.63 ; U2.36 3418.27,3968.27 C17.2 ; 3425.49,3975.49 cw(c3440,3960.98) C17.2@3440,3981.5 ; C17.2@3431.53,3981.53 ccw(c3425.55,3987.5) C17.2@3434,3987.5
  Top Layer w12: C5.1 2450,3360 2485,3325 U3.6 ; C5.1@2253.44,3346.56 cw(c2285.87,3314.13) 2285.87,3360 cw(c2285.87,3405.87) C5.1@2253.44,3373.44 ; C8.1@2366.56,3661.56 cw(c2322.06,3617.06) 2385,3617.06 ; C8.1@2375.05,3670.05 cw(c2351.03,3646.03) 2385,3646.03 ; C8.1@2383.61,3656.35 cw(c2389.73,3624.73) 2412.5,3647.5 ; U3.23 2385,3675 C8.1 2410,3650 U3.22 ; 2385,3641.2 cw(c2413.8,3641.2) C8.1@2393.44,3661.56 ; C8.1@2399,3675 ccw(c2432.8,3675) 2408.9,3651.1
  Top Layer w15: C19.2 C20.2 2920,3710 ; v1@2930,3685.26 ccw(c2895.85,3685.84) 2920,3710 ; v1@2944.74,3700 cw(c2944.16,3734.15) 2920,3710 ; v1(2945,3685) 2920,3710 ; C16.2 3305,3590 3327.13,3567.87 U4.4 ; 3307.47,3587.53 cw(c3273.57,3553.62) U4.4@3319.46,3539.72 ; 3325.18,3569.82 cw(c3300.74,3545.39) U4.4@3333.81,3535.38 ; v1@3360,4045 ccw(c3360,4093.28) 3394.14,4059.14 ; v1@3365,4030 3420,4085 3555,4085 3600,4040 R0.1 ; v1@3375,4030 cw(c3399.14,4030) 3382.07,4047.07
  Top Layer w20: v1(2990,4130) C18.2 ; v1@2998.84,4121.16 cw(c3020.18,4099.82) 3020.18,4130 cw(c3020.18,4160.18) v1@2998.84,4138.84 ; v1(3330,4130) v1@3340,4130 ; v1@3330.99,4117.54 cw(c3334.4,4074.41) 3365,4105 ; v1@3338.84,4121.16 cw(c3360.18,4099.82) 3360.18,4130 cw(c3360.18,4160.18) v1@3338.84,4138.84 ; v1@3351.16,4038.84 ccw(c3329.82,4060.18) 3360,4060.18 ccw(c3390.18,4060.18) v1@3368.84,4038.84 ; v1@3360,4017.5 cw(c3360,3987.32) 3381.34,4008.66 cw(c3402.68,4030) v1@3372.5,4030 ; C17.2 3400,3990 v1(3360,4030) 3360,4110 v1@3340,4130 ; 3532.5,4147.5 ccw(c3487.1,4192.9) pad.2@3547.41,4214.93 ; 3554.67,4169.67 ccw(c3519.59,4204.76) pad.2@3566.2,4221.79 ; pad.2@3575,4225 3575,4190 3515,4130 v1@3340,4130
  Top Layer w25: D2.1 1665,3685 v1(1675,3685) ; D2.1@1570,3627.5 ccw(c1570,3718.03) 1634.02,3654.02 ; D2.1@1595,3602.5 cw(c1625.18,3602.5) D2.1@1603.84,3623.84 ; 1640.86,3660.86 cw(c1675,3626.72) v1@1675,3675 ; C5.1@2231.16,3351.16 ccw(c2209.82,3329.82) 2209.82,3360 ccw(c2209.82,3390.18) C5.1@2231.16,3368.84 ; C5.1 2195,3360 2160,3395 2160,3565 v1(2280,3685) C8.1@2375,3685 ; v1@2270,3685 cw(c2245.86,3685) 2262.93,3667.93 cw(c2280,3650.86) v1@2280,3675 ; v1@2287.07,3677.93 cw(c2304.14,3660.86) 2304.14,3685 cw(c2304.14,3709.14) v1@2287.07,3692.07 ; C8.1@2371.16,3676.16 ccw(c2349.82,3654.82) 2349.82,3685 ccw(c2349.82,3715.18) C8.1@2371.16,3693.84 ; U4.2 C14.1 ; U4.2@3608.21,3493.53 cw(c3623.83,3477.9) 3623.83,3500 cw(c3623.83,3522.1) U4.2@3608.21,3506.47 ; C14.1@3686.57,3486.57 ccw(c3654.14,3454.14) 3654.14,3500 ccw(c3654.14,3545.86) C14.1@3686.57,3513.43
  Top Layer w35: v1(3240,3485) 3312.13,3485 U4.4 ; v1@3259.5,3485 ccw(c3259.5,3567.63) U4.4@3317.93,3509.2 ; U4.4@3317.93,3546.6 ccw(c3295.71,3568.81) 3327.13,3568.81 ccw(c3358.54,3568.81) U4.4@3336.33,3546.6 ; v1@3327.13,3632.13 U4.4 ; U4.4@3336.33,3490.8 cw(c3358.54,3468.59) 3358.54,3500 cw(c3358.54,3531.41) U4.4@3336.33,3509.2 ; U4.2 U4.4 ; C13.1@3690.1,3410.88 ccw(c3666.21,3434.77) 3700,3434.77 ccw(c3733.79,3434.77) C13.1@3709.9,3410.88 ; C14.1@3690.1,3489.12 cw(c3666.21,3465.23) 3700,3465.23 cw(c3733.79,3465.23) C14.1@3709.9,3489.12 ; C13.1 C14.1
  Top Layer w40: D1.1@1552.63,3985.13 cw(c1510.68,3943.18) 1570,3943.18 ; D2.1@1557.63,3614.87 ccw(c1527.75,3644.75) 1570,3644.75 ccw(c1612.25,3644.75) D2.1@1582.37,3614.87 ; D2.1 D1.1@1570,4005
  Bottom Layer w20: v1(2990,4130) v1(3330,4130) ; v1@2998.84,4121.16 cw(c3020.18,4099.82) 3020.18,4130 cw(c3020.18,4160.18) v1@2998.84,4138.84 ; v1@3321.16,4121.16 ccw(c3299.82,4099.82) 3299.82,4130 ccw(c3299.82,4160.18) v1@3321.16,4138.84
  Bottom Layer w25: v1(1675,3685) v1(2280,3685) v1(2945,3685) ; v1@1682.07,3677.93 cw(c1699.14,3660.86) 1699.14,3685 cw(c1699.14,3709.14) v1@1682.07,3692.07 ; v1@2272.93,3677.93 ccw(c2255.86,3660.86) 2255.86,3685 ccw(c2255.86,3709.14) v1@2272.93,3692.07 ; v1@2287.07,3677.93 cw(c2304.14,3660.86) 2304.14,3685 cw(c2304.14,3709.14) v1@2287.07,3692.07 ; v1@2937.93,3677.93 ccw(c2920.86,3660.86) 2920.86,3685 ccw(c2920.86,3709.14) v1@2937.93,3692.07
  Bottom Layer w35: v1(2945,3685) 2995,3635 3145,3485 v1(3240,3485) ; v1(3330,3635) 3360,3665 v1(3360,4030)
XI: C10.1 U3.11 X1.2 | length 545
  Top Layer w12: U3.11 2610,3320 2676.61,3386.61 X1.2 ; X1.2@2820.61,3374.15 ccw(c2790.53,3344.07) 2790.53,3386.61 ccw(c2790.53,3429.16) X1.2@2820.61,3399.07 ; X1.2@2820.61,3403.01 ccw(c2773.8,3449.82) 2840,3449.82 ; X1.2@2829.1,3394.53 ccw(c2802.77,3420.85) 2840,3420.85 ; X1.2@2840,3393.54 C10.1 ; 2840,3416.37 ccw(c2858.89,3416.37) X1.2@2845.53,3403.01
XIN: C6.1 U2.5 Y1.2 | length 473.9
  Top Layer w8: Y1.2@2773.07,3923.06 cw(c2773.07,3866.18) 2813.29,3906.4 ; Y1.2@2773.07,3931.06 cw(c2773.07,3893.49) 2799.63,3920.05 ; Y1.2 2819.69,3900 2905,3900 2915.47,3889.53 U2.5 ; Y1.2@2792.69,3942.68 ccw(c2830.56,3942.68) 2803.78,3915.9
  Top Layer w20: Y1.2@2763.44,3960.18 ccw(c2723.46,4000.17) 2780,4000.17 ; Y1.2@2780,3953.54 C6.1
XO: C11.1 U3.12 X1.1 | length 549.7
  Top Layer w12: U3.12 2635,3305 2670,3340 2860,3340 X1.1 C11.1 ; 2863.2,3336.8 ccw(c2900,3373.61) X1.1@2900,3321.56 ; 2872.7,3327.3 cw(c2849.34,3303.94) X1.1@2882.38,3303.94 ; X1.1@2887.54,3283.6 cw(c2857.46,3253.52) 2900,3253.52 cw(c2942.54,3253.52) X1.1@2912.46,3283.6
XOUT: C7.1 U2.6 Y1.1 | length 402.8
  Top Layer w8: Y1.1 2910,3860 2919.84,3869.84 U2.6 ; Y1.1@2848.22,3851.78 cw(c2868.06,3831.94) 2868.06,3860 cw(c2868.06,3888.06) Y1.1@2848.22,3868.22 ; Y1.1@2853.87,3846.13 cw(c2887.37,3812.63) 2887.37,3860 cw(c2887.37,3907.37) Y1.1@2853.87,3873.87
  Top Layer w20: Y1.1@2830.37,3846.43 cw(c2807.11,3823.18) 2840,3823.18 cw(c2872.89,3823.18) Y1.1@2849.63,3846.43 ; C7.1 Y1.1
pads on no net: U1. U1.4 U2.1 U2.2 U2.3 U2.4 U2.10 U2.11 U2.12 U2.18 U2.19 U2.21 U2.22 U2.25 U2.26 U2.27 U2.28 U2.29 U2.30 U2.31 U2.38 U2.39 U2.40 U2.41 U2.42 U2.43 U3.5 U3.13 U3.14 U3.15 U3.17

## Polygon pours and split planes (outlines as drawn)
GND on Top Layer "GND" (solid, remove dead copper): 1440,4355 1440,2710 3890,2710 3890,4355 1440,4355
GND on Bottom Layer "GND" (solid, remove dead copper): 1440,4355 3890,4355 3890,2710 1440,2710 1440,4355

## Keep-outs
Keep-Out Layer:
  the board outline again, w1.97

## Silkscreen, mask and mechanical layers (free items; w line width, h text height)
Top Overlay:
  drawing of 503 lines, arcs and shapes, not listed
  text "TCK" at 3200,4300 h50
  text "TMS" at 3375,4295 h50
  text "VCC" at 3535,4295 h50
  text "GND" at 3645,4190 h50
  text "TM" at 1705,3343 h50

## Text inside footprints (layer, text, board x,y; h text height)
P1: Top Overlay "D-" at 2760,2920 h30 r180; Top Overlay "D+" at 2670,2920 h30 r180; Top Overlay "V" at 2840,2920 h30 r180; Top Overlay "G" at 2560,2920 h30 r180
P2: Top Overlay "D-" at 3460,2920 h30 r180; Top Overlay "D+" at 3370,2920 h30 r180; Top Overlay "V" at 3540,2920 h30 r180; Top Overlay "G" at 3260,2920 h30 r180
P3: Top Overlay "D-" at 2040,2920 h30 r180; Top Overlay "D+" at 1950,2920 h30 r180; Top Overlay "V" at 2120,2920 h30 r180; Top Overlay "G" at 1840,2920 h30 r180
U1: Top Overlay "+" at 3707.48,3750.08 h30 r90